# Altium PCB STM32F407VET6mini-PCB.PcbDoc
Units mil, origin at the board's own origin, x right, y up, seen from the top; angles counter-clockwise.
Board outline 1950 x 1551 mil, 2 copper layers (Top Layer, Bottom Layer); 59 components, 0 nets, 345 pads, 0 vias.
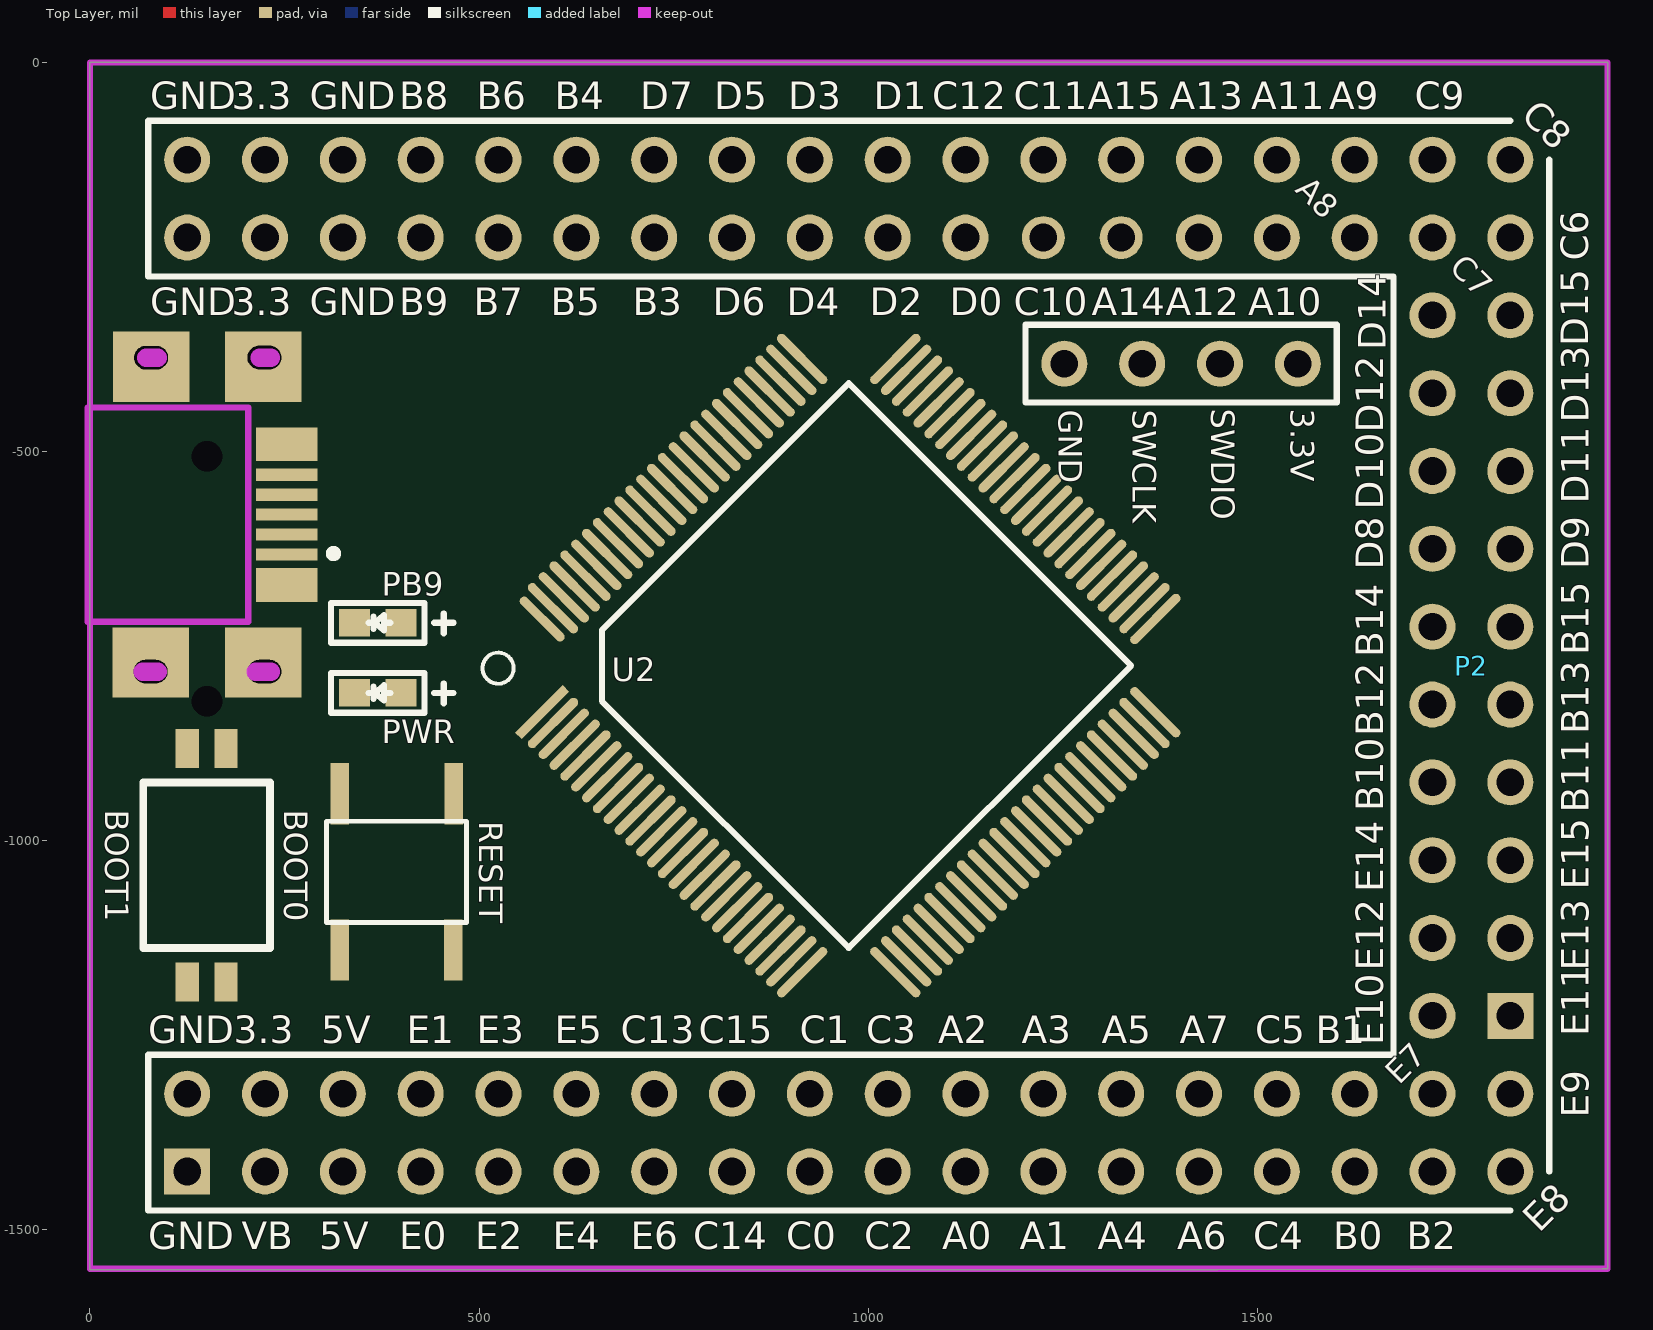
[diagram p0: Top Layer view]
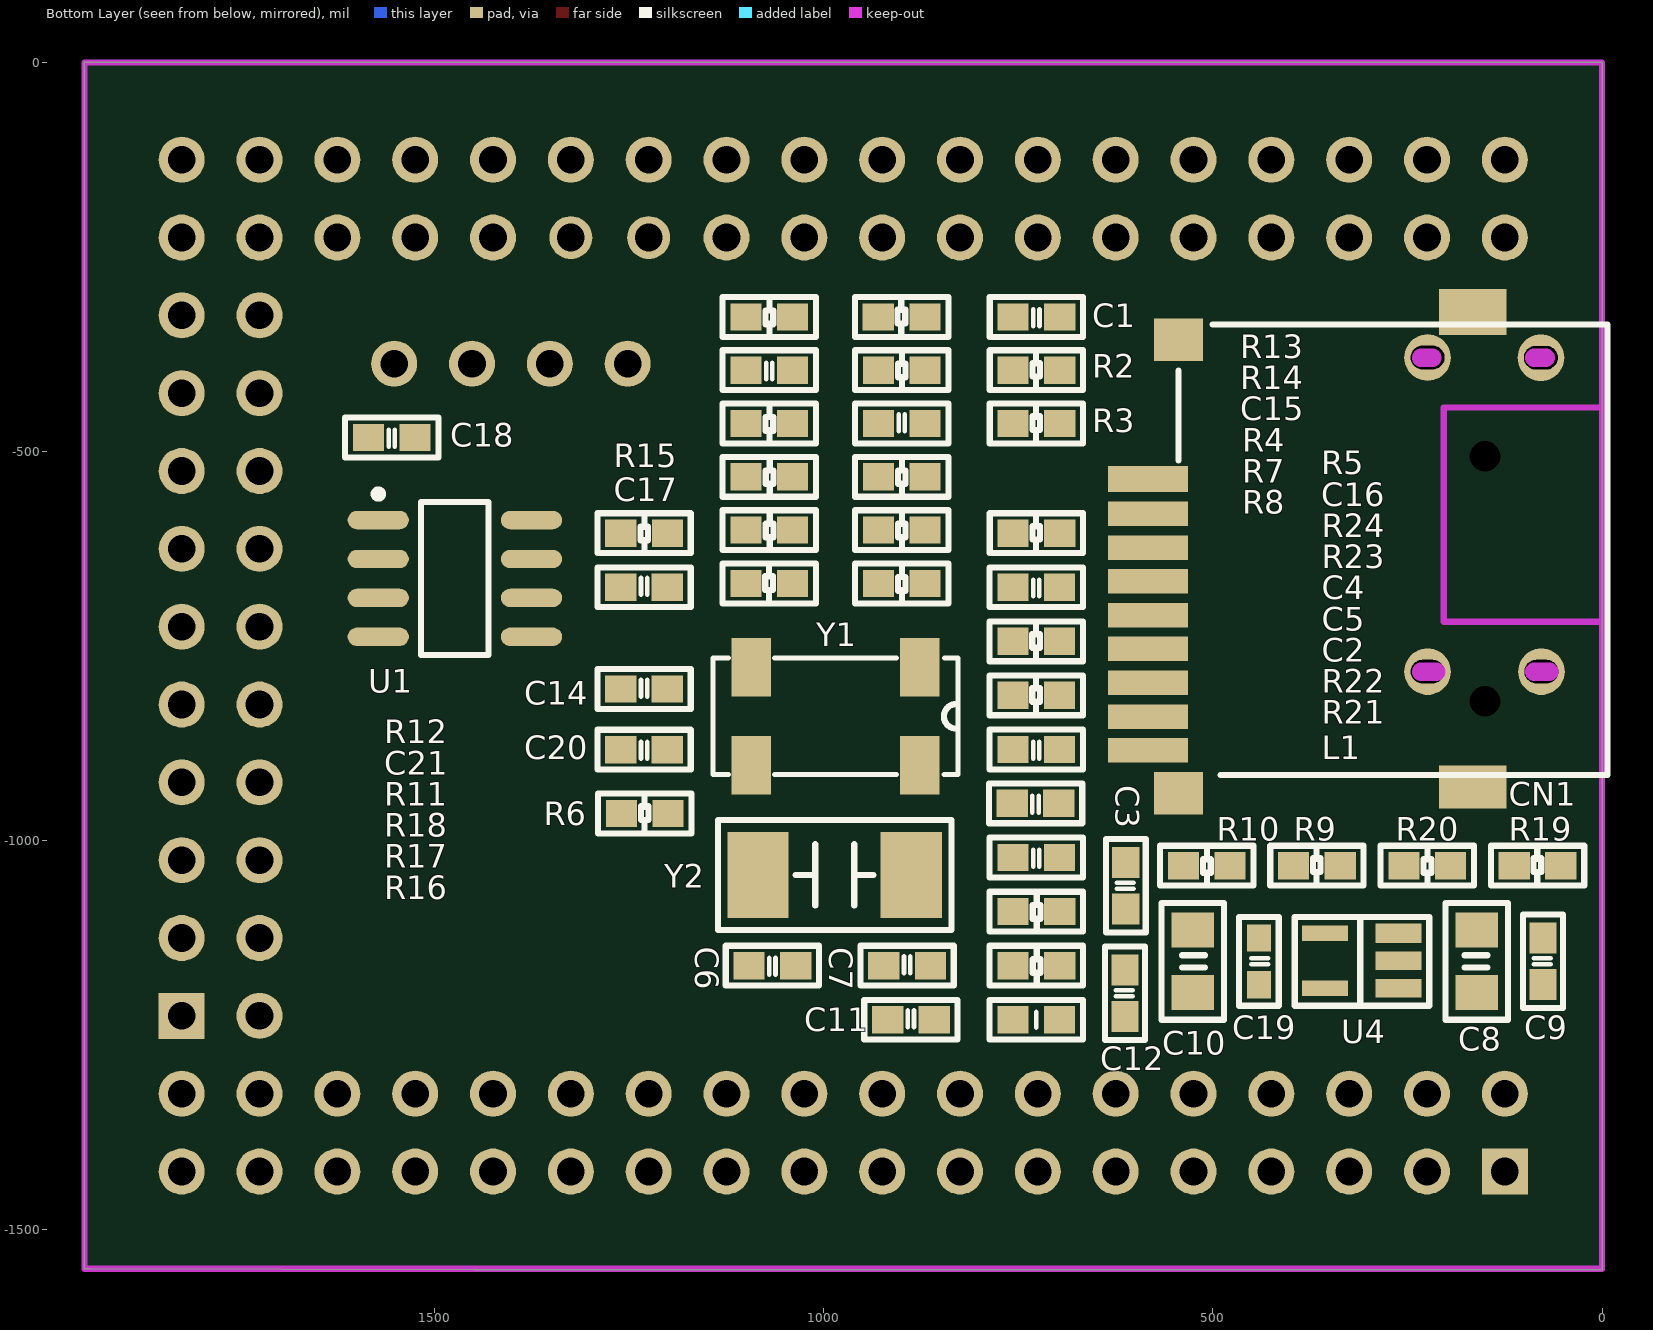
[diagram p1: Bottom Layer view, seen from below]

## Layer stack, top to bottom
Top Solder: solder mask 0.4, Solder Resist, Dk 3.5
Top Layer: signal copper 1.4
Dielectric1: dielectric 12.6, FR-4, Dk 4.8
Bottom Layer: signal copper 1.4
Bottom Solder: solder mask 0.4, Solder Resist, Dk 3.5

## Board outline
1449,-1551 0,-1551 0,-12 0,0 51,0 1950,0 1950,-713 1950,-1550 1943,-1550

## Design rules (kind name [scope] priority, off if disabled: settings)
Clearance [All] p1: gap=6
FabricationTestpoint [(IsPad And (OnTopLayer Or OnBottomLayer))] p1: side=3 testpointundercomponent=TRUE minsize=40 maxsize=100 preferedsize=60 minholesize=0 maxholesize=40 preferedholesize=32 testpointgrid=1 allowsidetop=TRUE allowsidebottom=TRUE usegrid=TRUE gridtolerance=0.01
HoleToHoleClearance [All] p1: gap=0 allowstackedmicrovias=TRUE
MinimumSolderMaskSliver [All] p1: minsoldermaskwidth=0
PolygonConnect PolygonConnect_1 [(InPadClass('All Pads'))] p1: connectstyle=Relief reliefconductorwidth=30 reliefentries=4 polygonreliefangle="90 Angle" airgapwidth=10
PolygonConnect [All] p2: connectstyle=Direct reliefconductorwidth=30 reliefentries=4 polygonreliefangle="90 Angle" airgapwidth=10
RoutingVias [All] p1: holewidth=15 width=30 viastyle="Through Hole" minholewidth=10 minwidth=20 maxholewidth=28 maxwidth=50
SilkToSilkClearance [All] p1: silktosilkclearance=0
SilkToSolderMaskClearance SilkscreenOverComponentPads [IsPad] p1: minsilkscreentomaskgap=0 clearancetoexposedcopper=TRUE
SolderMaskExpansion [All] p1: expansion=4
Width [All] p1: maxlimit=100 minlimit=6 preferedwidth=8 minimp=50.000000 maximp=50.000000 favimp=50.000000
24 further rules are at their usual default settings.

## Classes and differential pairs
component class STM32F103VET6最小系统: C1 C2 C3 C4 C5 C6 C7 C8 C11 C14 C16 C17 L1 PB9 PWR R2 R3 R4 R5 R6 R7 R8 R9 R10 RESET U1 U2 Y1 Y2

## Components (designator, comment, footprint, x,y, rotation, side; value= is the part's Value field where it differs from the comment)
C1 "104,0603" C0603#1 726.79,-327 r180 bottom
C2 "105,0603" C0603#1 726.93,-1021.62 r180 bottom
C3 "104,0603" C0603#1 612,-1058 r270 bottom
C4 "20p" C0603#1 726.93,-882.69 r180 bottom
C5 "20p" C0603#1 728,-952 r180 bottom
C6 "20p" C0603#1 1066,-1160.54 r180 bottom
C7 "20p" C0603#1 893,-1160.54 r0 bottom
C8 "Cap Pol1" C0805tan 161,-1155 r270 bottom (schematic designator C4)
C9 "104,0603" C0603#1 76,-1155 r270 bottom (schematic designator C19)
C10 "Cap Pol1" C0805tan 526,-1155 r90 bottom (schematic designator C4)
C11 "104,0603" C0603#1 888,-1230 r0 bottom
C12 "104,0603" C0603#1 613,-1196 r270 bottom (schematic designator C21)
C14 "104,0603" C0603#1 1231,-805 r0 bottom
C15 "104,0603" C0603#1 900,-463.96 r0 bottom
C16 "104,0603" C0603#1 726.93,-674.31 r180 bottom
C17 "104,0603" C0603#1 1231,-674.31 r0 bottom
C18 "104,0603" C0603#1 1555,-482 r180 bottom
C19 "20p,0603" C0603#2 441,-1155 r90 bottom (schematic designator C10)
C20 "104,0603" C0603#1 1231,-883 r180 bottom (schematic designator C19)
C21 "105,0603" C0603#1 1070.07,-395.48 r180 bottom (schematic designator C2)
CN1 "SD" TF 587,-580 r180 bottom locked
L1 "" L0603 726.93,-1230 r0 bottom
P1 "Header 18X2" HDR2X18#1 975,-1375 r0 top
P2 "Header 10X2" HDR2X10 1775,-775 r90 top
P3 "Header 18X2" HDR2X18#2 975,-175 r180 top locked
PB9 "LED,0805" LED0603 370,-720 r0 top (schematic designator PC1)
PWR "LED,0805" LED0603 370,-810 r0 top (schematic designator PWR1)
R2 "4.7k,0603" R0603 726.86,-395.48 r0 bottom
R3 "4.7k,0603" R0603 726.86,-463.96 r0 bottom
R4 "20R,0603" R0603 899.93,-532.45 r180 bottom
R5 "100K,0603" R0603 726.86,-604.85 r0 bottom
R6 "100k,0603" R0603 1230,-965 r0 bottom
R7 "20R,0603" R0603 899.93,-600.93 r180 bottom
R8 "4.7k,0603" R0603 899.93,-669.41 r180 bottom
R9 "510R,0603" R0603 366.43,-1032 r0 bottom
R10 "510R,0603" R0603 508,-1032 r180 bottom
R11 "100k,0603" R0603 1070.14,-463.96 r180 bottom (schematic designator R6)
R12 "100k,0603" R0603 1070,-327 r180 bottom (schematic designator R6)
R13 "100k,0603" R0603 900.07,-327 r0 bottom (schematic designator R6)
R14 "100k,0603" R0603 899.93,-395.48 r180 bottom (schematic designator R6)
R15 "100k,0603" R0603 1230.93,-604.85 r180 bottom (schematic designator R6)
R16 "100k,0603" R0603 1070.07,-669.41 r0 bottom (schematic designator R6)
R17 "100k,0603" R0603 1069.93,-600.93 r180 bottom (schematic designator R6)
R18 "100k,0603" R0603 1069.93,-532.45 r180 bottom (schematic designator R6)
R19 "100k,0603" R0603 83,-1032 r0 bottom (schematic designator R6)
R20 "100k,0603" R0603 224.57,-1032 r180 bottom (schematic designator R6)
R21 "20R,0603" R0603 726.86,-1160.54 r180 bottom (schematic designator R7)
R22 "20R,0603" R0603 726.86,-1091.08 r180 bottom (schematic designator R7)
R23 "100k,0603" R0603 727,-813.23 r0 bottom (schematic designator R6)
R24 "100k,0603" R0603 727,-743.77 r0 bottom (schematic designator R6)
RESET "3*4 key" KEY-SMT 394,-1040 r90 top (schematic designator SW1)
U1 "24C02" SOP8_N 1474,-663 r180 bottom
U2 "STM32F103VB/ET6" LQFP-100 975,-775 r45 top locked
U4 "RT9193" SOT-23-5 309,-1154.29 r90 bottom (schematic designator U2)
Y1 "32.768K" MC-306 985,-840 r0 bottom
Y2 "8MHz" 5032 986,-1044 r180 bottom
? "Comment" HDR1X4 1552,-387 r180 top
? "Comment" BOOT 150,-1031.5 r180 top
? "Comment" "Micro_USB_v2 - duplicate" 243,-581 r270 top

## Footprints (in the part's own frame and the unit in brackets; to place one, negate y for a bottom-side part, rotate by r counter-clockwise, add the part's x,y. Pads: shape width x height; smd on the part's side, far side on the other; paste and mask are expansions set on the pad)
5032 [mm]
  rect 2x2.8 smd: 1(-2.5,0) 2(2.5,0)
  silkscreen extent -3.81,-1.8 3.81,1.8
BOOT [mm]
  rect 0.76x1.27 smd: 1(-0.635,-3.81) 2(0.635,-3.81) 3(0.635,3.81) 4(-0.635,3.81)
  silkscreen extent -2.07,-2.7 2.07,2.7
C0603#1 [mil]
  rect 40x35 smd: 1(-29.92,0) 2(29.92,0)
  silkscreen extent -60,-26 60,26
C0603#2 [mil]
  rect 35x31 smd: 1(-29.92,0) 2(29.92,0)
  silkscreen extent -57,-26 57,26
C0805tan [mil]
  rect 45x55 smd: 1(-40,0) 2(40,0)
  silkscreen extent -75,-40 75,40
HDR1X4 [mm] "Connector; Header; 4 Position"
  round 1.5 hole 0.9: 1(0,0) 2(2.54,0) 3(5.08,0) 4(7.62,0)
  silkscreen extent -1.27,-1.27 8.89,1.27
HDR2X10 [mm]
  rect 1.5x1.5 hole 0.9: 1(-11.43,-1.27)
  round 1.5 hole 0.9: 2(-11.43,1.27) 3(-8.89,-1.27) 4(-8.89,1.27) 5(-6.35,-1.27) 6(-6.35,1.27) 7(-3.81,-1.27) 8(-3.81,1.27) 9(-1.27,-1.27) 10(-1.27,1.27) 11(1.27,-1.27) 12(1.27,1.27) 13(3.81,-1.27) 14(3.81,1.27) 15(6.35,-1.27) 16(6.35,1.27) 17(8.89,-1.27) 18(8.89,1.27) 19(11.43,-1.27) 20(11.43,1.27)
  silkscreen extent -12.7,-2.54 12.7,2.54
HDR2X18#1 [mm]
  rect 1.5x1.5 hole 0.9: 1(-21.59,-1.27)
  round 1.5 hole 0.9: 2(-21.59,1.27) 3(-19.05,-1.27) 4(-19.05,1.27) 5(-16.51,-1.27) 6(-16.51,1.27) 7(-13.97,-1.27) 8(-13.97,1.27) 9(-11.43,-1.27) 10(-11.43,1.27) 11(-8.89,-1.27) 12(-8.89,1.27) 13(-6.35,-1.27) 14(-6.35,1.27) 15(-3.81,-1.27) 16(-3.81,1.27) 17(-1.27,-1.27) 18(-1.27,1.27) 19(1.27,-1.27) 20(1.27,1.27) 21(3.81,-1.27) 22(3.81,1.27) 23(6.35,-1.27) 24(6.35,1.27) 25(8.89,-1.27) 26(8.89,1.27) 27(11.43,-1.27) 28(11.43,1.27) 29(13.97,-1.27) 30(13.97,1.27) 31(16.51,-1.27) 32(16.51,1.27) 33(19.05,-1.27) 34(19.05,1.27) 35(21.59,-1.27) 36(21.59,1.27)
  silkscreen extent -22.86,-2.54 22.86,2.54
HDR2X18#2 [mm]
  round 1.5 hole 0.9: 1(-21.59,-1.27) 2(-21.59,1.27) 3(-19.05,-1.27) 4(-19.05,1.27) 5(-16.51,-1.27) 6(-16.51,1.27) 7(-13.97,-1.27) 8(-13.97,1.27) 9(-11.43,-1.27) 10(-11.43,1.27) 11(-8.89,-1.27) 13(-6.35,-1.27) 15(-3.81,-1.27) 16(-3.81,1.27) 17(-1.27,-1.27) 18(-1.27,1.27) 19(1.27,-1.27) 20(1.27,1.27) 21(3.81,-1.27) 22(3.81,1.27) 23(6.35,-1.27) 24(6.35,1.27) 25(8.89,-1.27) 26(8.89,1.27) 27(11.43,-1.27) 28(11.43,1.27) 29(13.97,-1.27) 30(13.97,1.27) 31(16.51,-1.27) 32(16.51,1.27) 33(19.05,-1.27) 34(19.05,1.27) 35(21.59,-1.27) 36(21.59,1.27)
  round 1.4 hole 0.9: 12(-8.89,1.27) 14(-6.35,1.27)
  silkscreen extent -22.86,-2.54 22.86,2.54
KEY-SMT [mm]
  rect 2x0.6 smd: 1(-2.55,-1.85) 1(2.55,-1.87) 2(-2.55,1.85) 2(2.55,1.85)
  silkscreen extent -1.65,-2.29 1.65,2.29
L0603 [mil]
  rect 40x35 smd: 1(-29.92,0) 2(29.92,0)
  silkscreen extent -60,-26 60,26
LED0603 [mil]
  rect 40x35 smd: 1(29.92,0) 2(-29.92,0)
  silkscreen extent -60,-26 97,26
LQFP-100 [mm]
  rect 2.2x0.3 smd: 1(-8.15,6)
  oval 2.2x0.3 smd: 2(-8.15,5.5) 3(-8.15,5) 4(-8.15,4.5) 5(-8.15,4) 6(-8.15,3.5) 7(-8.15,3) 8(-8.15,2.5) 9(-8.15,2) 10(-8.15,1.5) 11(-8.15,1) 12(-8.15,0.5) 13(-8.15,0) 14(-8.15,-0.5) 15(-8.15,-1) 16(-8.15,-1.5) 17(-8.15,-2) 18(-8.15,-2.5) 19(-8.15,-3) 20(-8.15,-3.5) 21(-8.15,-4) 22(-8.15,-4.5) 23(-8.15,-5) 24(-8.15,-5.5) 25(-8.15,-6) 51(8.15,-6) 52(8.15,-5.5) 53(8.15,-5) 54(8.15,-4.5) 55(8.15,-4) 56(8.15,-3.5) 57(8.15,-3) 58(8.15,-2.5) 59(8.15,-2) 60(8.15,-1.5) 61(8.15,-1) 62(8.15,-0.5) 63(8.15,0) 64(8.15,0.5) 65(8.15,1) 66(8.15,1.5) 67(8.15,2) 68(8.15,2.5) 69(8.15,3) 70(8.15,3.5) 71(8.15,4) 72(8.15,4.5) 73(8.15,5) 74(8.15,5.5) 75(8.15,6)
  oval 0.3x2.2 smd: 26(-6,-8.15) 27(-5.5,-8.15) 28(-5,-8.15) 29(-4.5,-8.15) 30(-4,-8.15) 31(-3.5,-8.15) 32(-3,-8.15) 33(-2.5,-8.15) 34(-2,-8.15) 35(-1.5,-8.15) 36(-1,-8.15) 37(-0.5,-8.15) 38(0,-8.15) 39(0.5,-8.15) 40(1,-8.15) 41(1.5,-8.15) 42(2,-8.15) 43(2.5,-8.15) 44(3,-8.15) 45(3.5,-8.15) 46(4,-8.15) 47(4.5,-8.15) 48(5,-8.15) 49(5.5,-8.15) 50(6,-8.15) 76(6,8.15) 77(5.5,8.15) 78(5,8.15) 79(4.5,8.15) 80(4,8.15) 81(3.5,8.15) 82(3,8.15) 83(2.5,8.15) 84(2,8.15) 85(1.5,8.15) 86(1,8.15) 87(0.5,8.15) 88(0,8.15) 89(-0.5,8.15) 90(-1,8.15) 91(-1.5,8.15) 92(-2,8.15) 93(-2.5,8.15) 94(-3,8.15) 95(-3.5,8.15) 96(-4,8.15) 97(-4.5,8.15) 98(-5,8.15) 99(-5.5,8.15)
  oval 0.3x1.95 smd: 100(-6,8.15)
  silkscreen extent -8.66,-6.51 6.51,8.54
MC-306 [mm]
  rect 1.3x1.9 smd: 1(-2.75,-1.6) 2(2.75,-1.6) 3(2.75,1.6) 4(-2.75,1.6)
  silkscreen extent -4,-1.9 4,1.9
"Micro_USB_v2 - duplicate" [mm]
  round 1.524 hole 0.762 slot 1.1 at 90 deg: 0(-5.125,-0.475) 0(-5.12,-4.175) 0(5.125,-0.475) 0(5.125,-4.191)
  rect 0.4x2 smd: 1(1.3,0.254) 2(0.65,0.254) 3(0,0.254) 4(-0.65,0.254) 5(-1.3,0.254)
  rect 2.3x2.5 smd: ""(-4.826,-0.508) ""(-4.826,-4.175) ""(4.826,-0.508) ""(4.826,-4.191)
  rect 1.1x2 smd: ""(-2.3,0.254) ""(2.3,0.254)
  Keep-Out Layer lines w0.203: -3.45,-6.25 3.5,-6.25 3.5,-1 ; -3.5,-6.25 -3.5,-1 ; 3.45,-1 -3.45,-1
  Keep-Out Layer lines w0.6: 5.125,-4.445 5.125,-3.962 ; -5.12,-4.335 -5.12,-3.962 ; 5.125,-0.762 5.125,-0.262 ; -5.125,-0.635 -5.125,-0.262
  silkscreen extent 1.15,1.65 1.4,1.9
R0603 [mil]
  rect 40x35 smd: 1(-29.92,0) 2(29.92,0)
  silkscreen extent -60,-26 60,26
SOP8_N [mm]
  oval 2x0.6 smd: 1(-2.5,1.905) 2(-2.5,0.635) 3(-2.5,-0.635) 4(-2.5,-1.905) 5(2.5,-1.905) 6(2.5,-0.635) 7(2.5,0.635) 8(2.5,1.905)
  silkscreen extent -2.63,-2.5 1.1,2.88, body extent -2,-2.5 2,2.5, height 1.75
SOT-23-5 [mm]
  rect 0.6x1.5 smd: 1(-0.9,-1.2) 2(0,-1.2)
  rect 0.63x1.5 smd: 3(0.9,-1.2)
  rect 0.5x1.5 smd: 4(0.9,1.2) 5(-0.9,1.2)
  silkscreen extent -1.47,-2.21 1.43,2.18
TF [mm]
  rect 2.6x0.85 smd: 1(0.088,1.143)
  rect 2.6x0.8 smd: 2(0.088,0.002) 3(0.088,-1.101) 4(0.088,-2.204) 5(0.088,-3.307) 6(0.088,-4.411) 7(0.088,-5.514) 8(0.088,-6.617) 9(0.088,-7.72)
  round 0 hole 1: 11(11.088,1.88) 12(11.088,-6.12)
  rect 1.6x1.4 smd: G1(1.088,-9.12) G4(1.088,5.68)
  rect 2.2x1.5 smd: G2(10.688,6.58)
  rect 2.2x1.4 smd: G3(10.688,-8.92)
  silkscreen extent 1.09,-8.52 15.09,6.18

## Nets (pads, with @x,y where several pads share a name; then routed paths per layer and width w, separated by ;. In a path a pad name is that pad's centre, name@x,y a point inside that pad or via, vN(x,y) a via of type N, cw(c..) or ccw(c..) an arc to the next point about the centre after c; other vN are vias at no path point)
pads on no net: ?. ?.0 ?.1 ?.2 ?.3 ?.4 ?.5 C1.1 C1.2 C2.1 C2.2 C3.1 C3.2 C4.1 C4.2 C5.1 C5.2 C6.1 C6.2 C7.1 C7.2 C8.1 C8.2 C9.1 C9.2 C10.1 C10.2 C11.1 C11.2 C12.1 C12.2 C14.1 C14.2 C15.1 C15.2 C16.1 C16.2 C17.1 C17.2 C18.1 C18.2 C19.1 C19.2 C20.1 C20.2 C21.1 C21.2 CN1.1 CN1.2 CN1.3 CN1.4 CN1.5 CN1.6 CN1.7 CN1.8 CN1.9 CN1.11 CN1.12 CN1.G1 CN1.G2 CN1.G3 CN1.G4 L1.1 L1.2 P1.1 P1.2 P1.3 P1.4 P1.5 P1.6 P1.7 P1.8 P1.9 P1.10 P1.11 P1.12 P1.13 P1.14 P1.15 P1.16 P1.17 P1.18 P1.19 P1.20 P1.21 P1.22 P1.23 P1.24 P1.25 P1.26 P1.27 P1.28 P1.29 P1.30 P1.31 P1.32 P1.33 P1.34 P1.35 P1.36 P2.1 P2.2 P2.3 P2.4 P2.5 P2.6 P2.7 P2.8 P2.9 P2.10 P2.11 P2.12 P2.13 P2.14 P2.15 P2.16 P2.17 P2.18 P2.19 P2.20 P3.1 P3.2 P3.3 P3.4 P3.5 P3.6 P3.7 P3.8 P3.9 P3.10 P3.11 P3.12 P3.13 P3.14 P3.15 P3.16 P3.17 P3.18 P3.19 P3.20 P3.21 P3.22 P3.23 P3.24 P3.25 P3.26 P3.27 P3.28 P3.29 P3.30 P3.31 P3.32 P3.33 P3.34 P3.35 P3.36 PB9.1 PB9.2 PWR.1 PWR.2 R2.1 R2.2 R3.1 R3.2 R4.1 R4.2 R5.1 R5.2 R6.1 R6.2 R7.1 R7.2 R8.1 R8.2 R9.1 R9.2 R10.1 R10.2 R11.1 R11.2 R12.1 R12.2 R13.1 R13.2 R14.1 R14.2 R15.1 R15.2 R16.1 R16.2 R17.1 R17.2 R18.1 R18.2 R19.1 R19.2 R20.1 R20.2 R21.1 R21.2 R22.1 R22.2 R23.1 R23.2 R24.1 R24.2 RESET.1 RESET.2 U1.1 U1.2 U1.3 U1.4 U1.5 U1.6 U1.7 U1.8 U2.1 U2.2 U2.3 U2.4 U2.5 U2.6 U2.7 U2.8 U2.9 U2.10 U2.11 U2.12 U2.13 U2.14 U2.15 U2.16 U2.17 U2.18 U2.19 U2.20 U2.21 U2.22 U2.23 U2.24 U2.25 U2.26 U2.27 U2.28 U2.29 U2.30 U2.31 U2.32 U2.33 U2.34 U2.35 U2.36 U2.37 U2.38 U2.39 U2.40 U2.41 U2.42 U2.43 U2.44 U2.45 U2.46 U2.47 U2.48 U2.49 U2.50 U2.51 U2.52 U2.53 U2.54 U2.55 U2.56 U2.57 U2.58 U2.59 U2.60 U2.61 U2.62 U2.63 U2.64 U2.65 U2.66 U2.67 U2.68 U2.69 U2.70 U2.71 U2.72 U2.73 U2.74 U2.75 U2.76 U2.77 U2.78 U2.79 U2.80 U2.81 U2.82 U2.83 U2.84 U2.85 U2.86 U2.87 U2.88 U2.89 U2.90 U2.91 U2.92 U2.93 U2.94 U2.95 U2.96 U2.97 U2.98 U2.99 U2.100 U4.1 U4.2 U4.3 U4.4 U4.5 Y1.1 Y1.2 Y1.3 Y1.4 Y2.1 Y2.2

## Keep-outs
Keep-Out Layer:
  lines w8: 0,-1550 1950,-1550 1950,0 0,0 0,-1550

## Silkscreen, mask and mechanical layers (free items; w line width, h text height)
Top Overlay:
  text "GND" at 77.26,-60 h35
  text "3.3" at 182.26,-60 h35
  text "GND" at 282.26,-60 h35
  text "B8" at 397.26,-60 h35
  text "B6" at 497.26,-60 h35
  text "B4" at 597.26,-60 h35
  text "D7" at 707.26,-60 h35
  text "D5" at 802.26,-60 h35
  text "D3" at 897.26,-60 h35
  text "D1" at 1007.26,-60 h35
  text "C12" at 1082.26,-60 h35
  text "C11" at 1187.26,-60 h35
  text "A15" at 1282.26,-60 h35
  text "A13" at 1387.26,-60 h35
  text "A11" at 1492.26,-60 h35
  text "A9" at 1592.26,-60 h35
  text "C9" at 1702.26,-60 h35
  text "C8" at 1837.26,-70 h35 r315
  text "A8" at 1547.26,-165 h30 r315
  text "C6" at 1925,-255 h35 r90
  text "C7" at 1745,-265 h30 r315
  text "GND" at 77.26,-325 h35
  text "3.3" at 182.26,-325 h35
  text "GND" at 282.26,-325 h35
  text "B9" at 397.26,-325 h35
  text "B7" at 493.23,-325 h35
  text "B5" at 592.26,-325 h35
  text "B3" at 697.82,-325 h35
  text "D6" at 800,-325 h35
  text "D4" at 895.35,-325 h35
  text "D2" at 1002.26,-325 h35
  text "D0" at 1105,-325 h35
  text "C10" at 1187.26,-325 h35
  text "A14" at 1287.26,-325 h35
  text "A12" at 1382.26,-325 h35
  text "A10" at 1488,-325 h35
  text "D15" at 1925,-365 h35 r90
  text "D14" at 1665,-370 h35 r90
  text "SWDIO" at 1441,-445 h30 r270
  text "3.3V" at 1543,-445 h30 r270
  text "GND" at 1245,-446 h30 r270
  text "SWCLK" at 1340,-446 h30 r270
  text "D13" at 1926,-463 h35 r90
  text "D12" at 1662,-476 h35 r90
  text "D11" at 1926,-567 h35 r90
  text "D10" at 1662,-575 h35 r90
  text "D9" at 1926,-651 h35 r90
  text "D8" at 1662,-652 h35 r90
  text "B15" at 1926,-762 h35 r90
  text "B14" at 1662,-764 h35 r90
  text "B13" at 1926,-863 h35 r90
  text "B12" at 1662,-866 h35 r90
  text "BOOT1" at 20,-960 h30 r270
  text "BOOT0" at 250,-960 h30 r270
  text "B10" at 1662,-962 h35 r90
  text "B11" at 1926,-964 h35 r90
  text "E15" at 1926,-1063 h35 r90
  text "E14" at 1662,-1066 h35 r90
  text "E12" at 1662,-1167 h35 r90
  text "E13" at 1926,-1167 h35 r90
  text "E11" at 1926,-1251.34 h35 r90
  text "GND" at 75,-1260 h35
  text "3.3" at 185,-1260 h35
  text "5V" at 297.26,-1260 h35
  text "E1" at 407.26,-1260 h35
  text "E3" at 497.26,-1260 h35
  text "E5" at 597.26,-1260 h35
  text "C13" at 682.26,-1260 h35
  text "C15" at 782.26,-1260 h35
  text "C1" at 912.26,-1260 h35
  text "C3" at 997.26,-1260 h35
  text "A2" at 1090.1,-1260 h35
  text "A3" at 1197.26,-1260 h35
  text "A5" at 1299.84,-1260 h35
  text "A7" at 1400.23,-1260 h35
  text "C5" at 1497.26,-1260 h35
  text "B1" at 1575,-1260 h35
  text "E10" at 1662,-1263 h35 r90
  text "E7" at 1682.26,-1315 h30 r45
  text "E9" at 1926,-1356 h35 r90
  text "E8" at 1862.26,-1505 h35 r45
  text "GND" at 75,-1525 h35
  text "VB" at 195,-1525 h35
  text "5V" at 295,-1525 h35
  text "E0" at 397.26,-1525 h35
  text "E2" at 495,-1525 h35
  text "E4" at 595,-1525 h35
  text "E6" at 695,-1525 h35
  text "C14" at 775,-1525 h35
  text "C0" at 895,-1525 h35
  text "C2" at 995,-1525 h35
  text "A0" at 1095,-1525 h35
  text "A1" at 1195,-1525 h35
  text "A4" at 1295,-1525 h35
  text "A6" at 1397.26,-1525 h35
  text "C4" at 1495,-1525 h35
  text "B0" at 1597.26,-1525 h35
  text "B2" at 1692.26,-1525 h35
Bottom Overlay:
  text "http://vcc-gnd.taobao.com/" at 1207.26,1217 h35
  text "http://www.vcc-gnd.com/" at 1194.26,1148 h35